# Altium PCB Accelerometer.PcbDoc
Units mil, origin at the board's own origin, x right, y up, seen from the top; angles counter-clockwise.
Board outline 1835 x 1025 mil, 2 copper layers (Top Layer, Bottom Layer); 8 components, 8 nets, 32 pads, 0 vias.
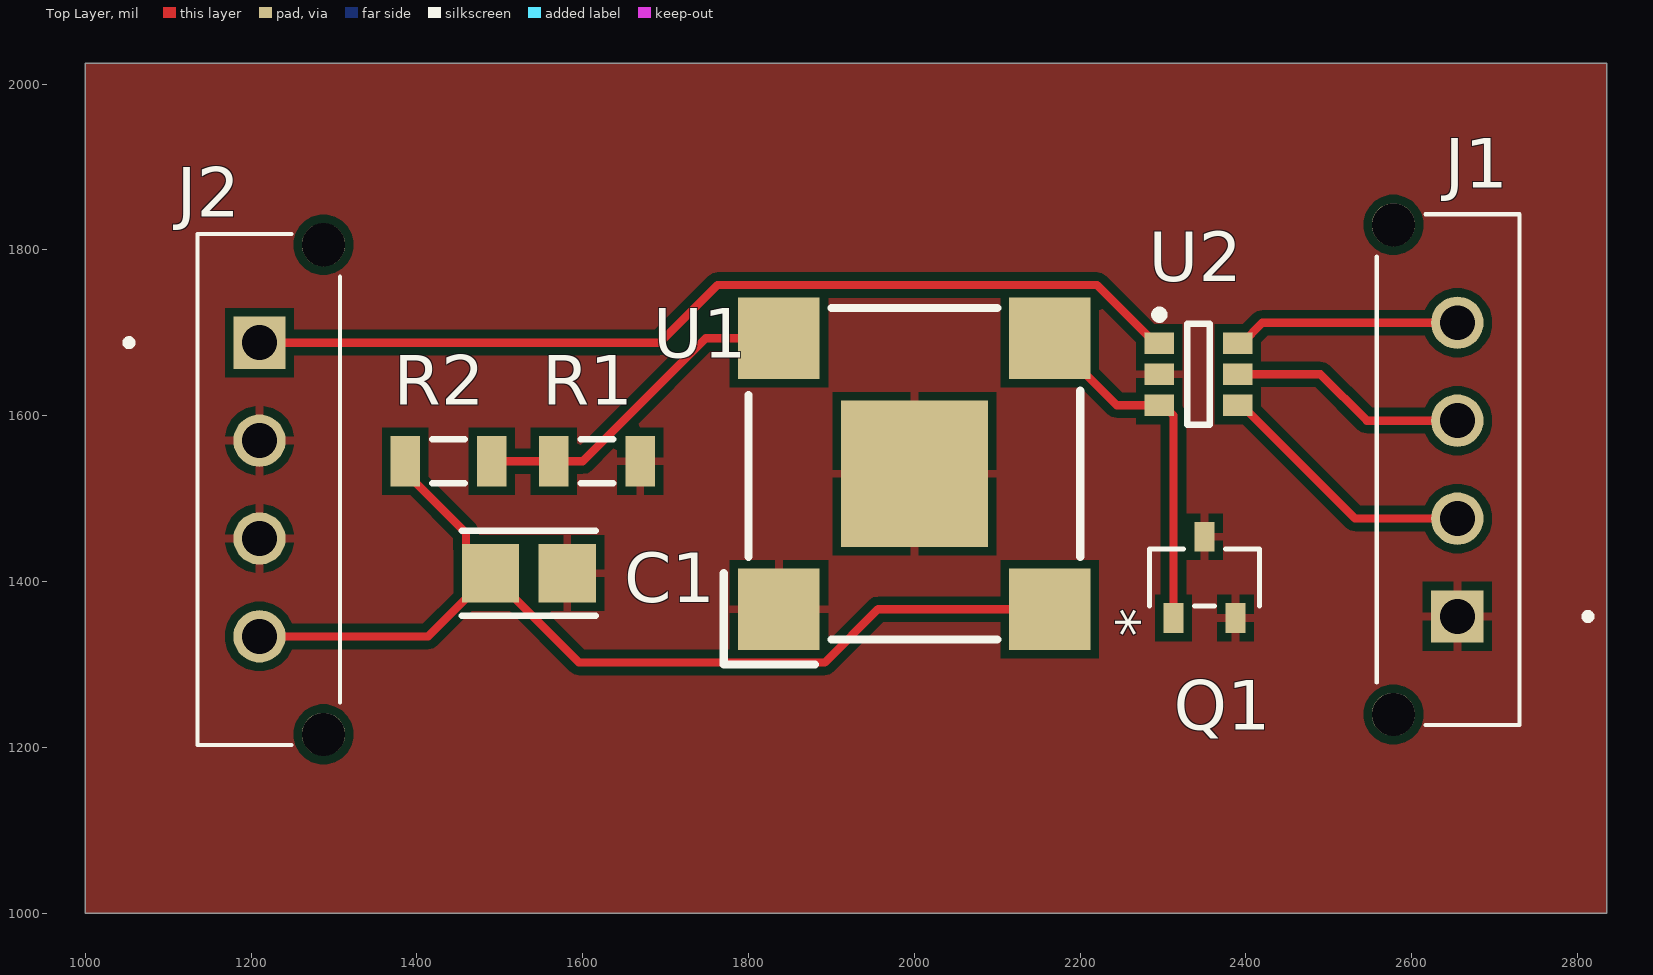
[diagram p0: Top Layer view]
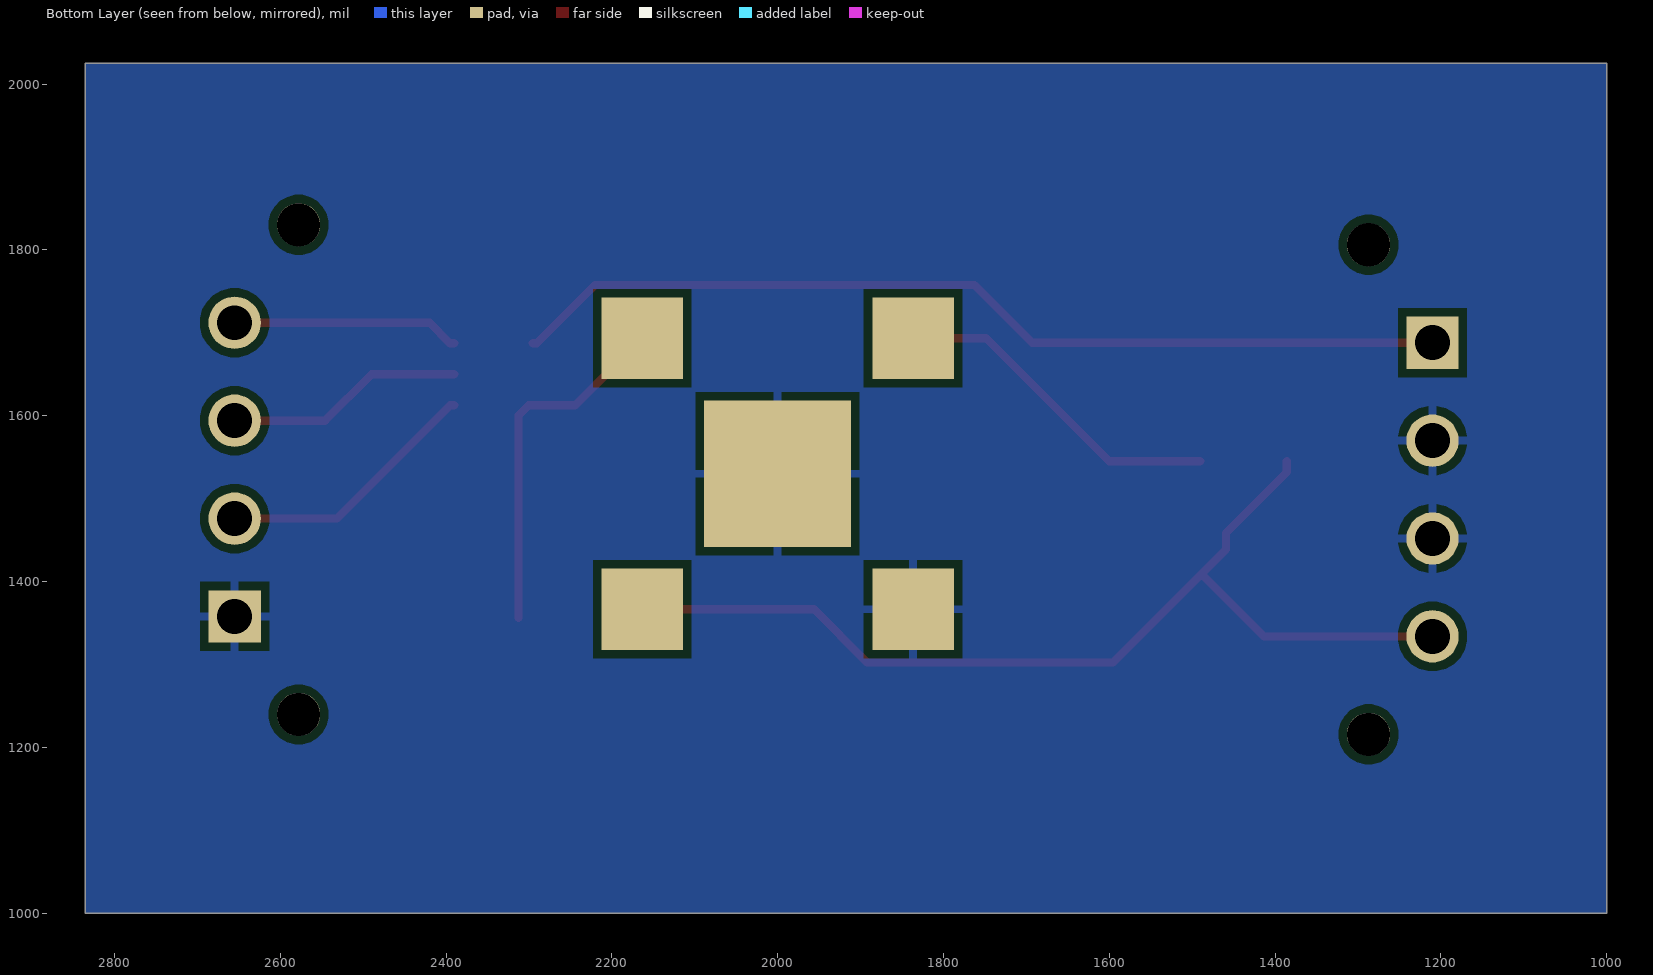
[diagram p1: Bottom Layer view, seen from below]

## Layer stack, top to bottom
Top Solder: solder mask 0.4, Solder Resist, Dk 3.5
Top Layer: signal copper 1.4
Dielectric 1: dielectric 12.6, FR-4, Dk 4.8
Bottom Layer: signal copper 1.4
Bottom Solder: solder mask 0.4, Solder Resist, Dk 3.5

## Board outline
1000,1000 2835,1000 2835,2025 1000,2025

## Design rules (kind name [scope] priority, off if disabled: settings)
Clearance [All] p1: gap=10 ignorepadtopadclearanceinfootprint=FALSE except(0: Arc-Hole Track-Hole SMDPad-Hole THPad-Hole Via-Hole Fill-Hole Poly-Hole Region-Hole Text-Hole)
PolygonConnect [All] p1: connectstyle=Relief reliefconductorwidth=10 reliefentries=4 polygonreliefangle="90 Angle" airgapwidth=10
RoomDefinition Accelerometer [InComponentClass('Accelerometer')] p1: confinementstyle=ConfineIn formatcopy=TRUE lockcomponents=FALSE outline 7045,1060 9205,1060 9205,1940 7045,1940
RoutingVias [All] p1: holewidth=28 width=50 viastyle="Through Hole" minholewidth=28 minwidth=50 maxholewidth=28 maxwidth=50
SolderMaskExpansion [All] p1: expansion=4 istentingtop=FALSE
Width [All] p1: maxlimit=10 minlimit=10 preferedwidth=10
30 further rules are at their usual default settings.

## Components (designator, comment, footprint, x,y, rotation, side; value= is the part's Value field where it differs from the comment)
C1 "C3216X7R2A684K160AA" FP-C3216-160-0_2-IPC_B 1535,1410 r0 top
J1 "0436500415" MOLEX_0436500415 2655,1535 r270 top
J2 "0436500415" MOLEX_0436500415 1210,1510.94 r90 top
Q1 "MMBF4117" MMBF4117_OSI 2350,1405 r90 top
R1 "ERJ-8ENF1003V" RESC3216X70X50LL05T20 1617.17,1545 r180 top
R2 "" RESC3216X70X50LL05T20 1437.83,1545 r180 top
U1 "540B" SENTHER_540B 2000,1530 r0 top
U2 "ADC121C027CIMK/NOPB" MK06A_L 2342.76,1650 r0 top

## Footprints (in the part's own frame and the unit in brackets; to place one, negate y for a bottom-side part, rotate by r counter-clockwise, add the part's x,y. Pads: shape width x height; smd on the part's side, far side on the other; paste and mask are expansions set on the pad)
FP-C3216-160-0_2-IPC_B [mil]
  rect 69.05x71.11 smd paste+0 mask+0: 1(-46.3,0) 2(46.3,0)
  silkscreen extent -81,-51 81,51, body extent -91,-45 91,45, height 10
MK06A_L [mm] "SOT23, 6-Leads, Body 3.0x1.7mm, Pitch 0.95mm, Lead Span 2.9mm, IPC High Density"
  rect 0.9x0.65 smd: 1(-1.2,0.95) 2(-1.2,0) 3(-1.2,-0.95) 4(1.2,-0.95) 5(1.2,0) 6(1.2,0.95)
  silkscreen extent -1.32,-1.55 0.35,1.95, body extent -0.87,-1.53 0.87,1.54, height 1
MMBF4117_OSI [mil]
  rect 36x24 smd paste+0 mask+0: 1(-49,37.4) 2(-49,-37.4) 3(49,0)
  silkscreen extent -35,-66 35,66, body extent -53,-61 53,61, height 47
MOLEX_0436500415 [mm]
  rect 1.605x1.605 hole 1.07: 1(4.5,0)
  round 1.605 hole 1.07: 2(1.5,0) 3(-1.5,0) 4(-4.5,0)
  round 1.32 hole 1.32 unplated: ""(-7.5,-1.96) ""(7.5,-1.96)
  silkscreen extent -7.83,-2.47 7.83,4.1
RESC3216X70X50LL05T20 [mm] "Chip Resistor, 2-Leads, Body 3.20x1.60mm, IPC High Density"
  rect 0.9x1.55 smd: 1(-1.325,0) 2(1.325,0)
  silkscreen extent -0.5,-0.67 0.5,0.67, body extent -1.63,-0.82 1.62,0.82, height 0.7
SENTHER_540B [mm] "Surface-Mount Shock Sensor"
  rect 2.5x2.5 all layers, no hole: 1(-4.15,-4.15) 2(4.15,-4.15) 3(4.15,4.15) 4(-4.15,4.15)
  rect 4.5x4.5 all layers, no hole: 5(0,0)
  silkscreen extent -5.84,-5.84 5.08,5.08

## Part data
C1: library part CMP-08246-005465-1, "Multilayer Ceramic Capacitors 680nF ±10% 100V X7R SMD 1206", Capacitance=680nF, Case Code (Imperial)=1206, Case Code (Metric)=3216, Max Operating Temperature=125°C, Min Operating Temperature=-55°C, Package Quantity=2000, Tolerance=10%, Voltage Rating=100V, Case/Package=1206, Length=0.126inch, Mount="Surface Mount", Packaging="Tape and Reel", RoHS Compliant=Yes, Series=C, Thickness=0.071inch, Width=0.063inch
J1 J2: "Connector Header Through Hole 4 position 0.118 (3.00mm)", Package=None, Availability=Unavailable, MF=Molex, MP=0436500415, Price=None, SnapEDA_Link=https://www.snapeda.com/parts/0436500415/Molex/view-part/425083/?ref=snap
Q1: "No Description Available", Mfr_Name=onsemi, Copyright="Copyright (C) 2024 Ultra Librarian. All rights reserved.", Manufacturer_Part_Number=MMBF4117, RefDes=RefDes, Type=DEV
R1: library part CMP-2003-00019-1, Manufacturer=Panasonic, Part Number=ERJ-8ENF1003V
R2: library part CMP-2003-00019-1, Manufacturer=Panasonic, Part Number=ERJ-8ENF1003V
U1: library part Component_1
U2: library part CMP-0054-00267-2, "I2C-Compatible, 12-Bit Analog-to-Digital Converter with Alert Function, 6-pin Tiny SOT23, Pb-Free", Manufacturer="National Semiconductor", PackageTopMarking=X31C*XTT, PowerWise=Y, Code_IPC=SOT26A-6, Code_JEDEC=MO-193-AA, ComponentLink1Description="ADC121C027 Datasheet", ComponentLink1URL=http://www.national.com/ds/AD/ADC121C027.pdf, ComponentLink2Description="ADC121C027 Web Page", ComponentLink2URL=http://www.national.com/pf/AD/ADC121C027.html, ComponentLink3Description="MK06A Package Page", ComponentLink3URL=http://www.national.com/packaging/folders/mk06a.html, CompType="ADC IC", DatasheetVersion=Apr-2009, PackageDescription="Molded TSOT, 2.97 x 1.65 x 0.87mm Body, 6 Lead, 0.95mm Pitch", PackageReference=MK06A, PackageVersion="revE, Nov-2008", PinCount=6, RevisionNote="Component URLs added", RoHS=Y

## Nets (pads, with @x,y where several pads share a name; then routed paths per layer and width w, separated by ;. In a path a pad name is that pad's centre, name@x,y a point inside that pad or via, vN(x,y) a via of type N, cw(c..) or ccw(c..) an arc to the next point about the centre after c; other vN are vias at no path point)
GND: C1.2 J1.1 J2.2 J2.3 Q1.2 Q1.3 R1.1 U1.1 U1.5 U2.2
NetC1_1: C1.1 J2.4 R2.2 U1.2 | length 1234
  Top Layer w10: J2.4 1413.5,1333.78 C1.1@1488.7,1408.97 ; R2.2 1385.67,1532.2 1459.17,1458.7 1459.17,1438.5 C1.1@1488.7,1408.97 ; U1.2 1956.25,1366.61 1892.04,1302.4 1595.27,1302.4 C1.1@1488.7,1408.97
NetJ1_2: J1.2 U2.4 | length 321.6
  Top Layer w10: U2.4 2394.92,1612.6 2531.57,1475.94 J1.2
NetJ1_3: J1.3 U2.5 | length 288.2
  Top Layer w10: U2.5 2489.79,1650 2545.74,1594.06 J1.3
NetJ1_4: J1.4 U2.6 | length 275.3
  Top Layer w10: U2.6 2394.92,1687.4 2419.69,1712.17 J1.4
NetJ2_1: J2.1 U2.1 | length 1143.4
  Top Layer w10: J2.1 1692.96,1688.11 1762.45,1757.6 2220.39,1757.6 2290.59,1687.4 U2.1
NetQ1_1: Q1.1 U1.3 U2.3 | length 432.1
  Top Layer w10: U1.3 2244.17,1612.6 U2.3 2300.43,1612.6 2312.6,1600.43 Q1.1
NetR1_2: R1.2 R2.1 U1.4 | length 408.1
  Top Layer w10: R2.1 R1.2 1599.89,1545 1748.27,1693.39 U1.4
pads on no net: J1. J2.

## Polygon pours and split planes (outlines as drawn)
GND on Top Layer "GND_L01_P000" (solid, pour order 0): 1000,2025 2835,2025 2835,1000 1000,1000
GND on Bottom Layer "GND_L02_P001" (solid, pour order 1): 1000,2025 2835,2025 2835,1000 1000,1000

## Text inside footprints (layer, text, board x,y; h text height)
J1: Top 3D Body "PCB THICKNESS: 0.062in/1.57mm" at 2740,1775.55 h24 r270
Q1: Top 3D Body "*" at 2336.6,1373 h50 r90; Top Overlay "*" at 2293.6,1333.5 h50 r90